# Altium PCB LineConector.PcbDoc
Units mm, origin at the board's own origin, x right, y up, seen from the top; angles counter-clockwise.
Board outline 16 x 46 mm, 2 copper layers (Top Layer, Bottom Layer); 2 components, 6 nets, 12 pads, 16 vias.
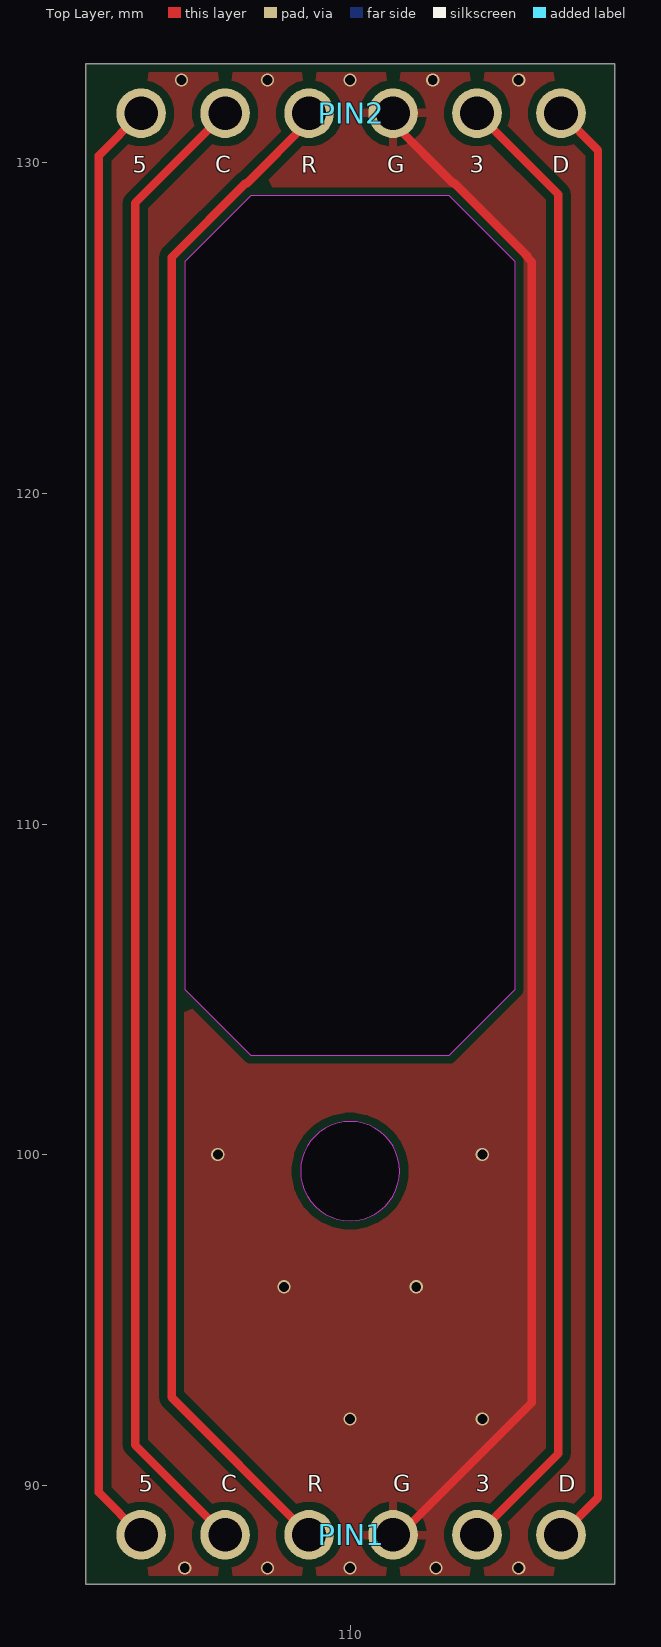
[diagram p0: Top Layer view]
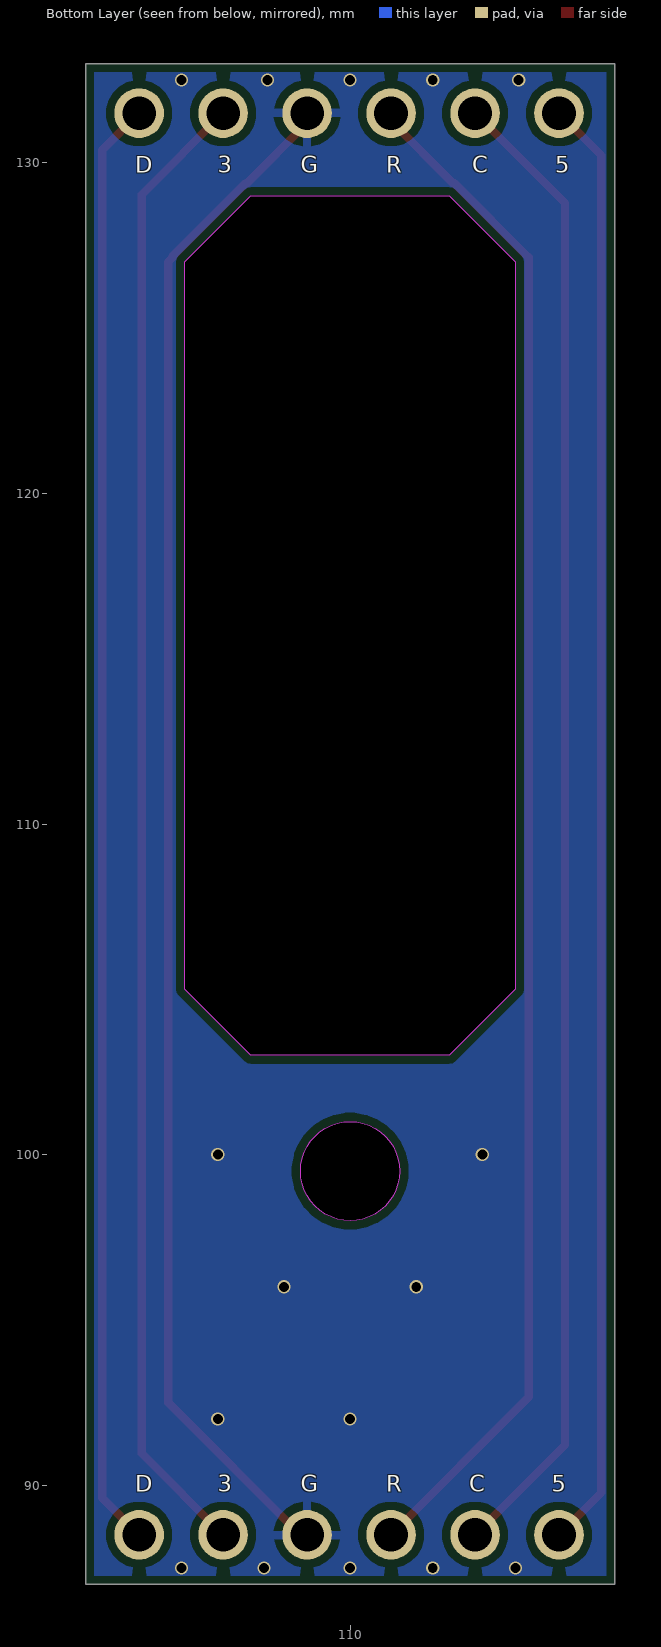
[diagram p1: Bottom Layer view, seen from below]

## Layer stack, top to bottom
Top Solder: solder mask 0.0102, Solder Resist, Dk 3.5
Top Layer: signal copper 0.0356
Dielectric 1: dielectric 0.32, FR-4, Dk 4.8
Bottom Layer: signal copper 0.0356
Bottom Solder: solder mask 0.0102, Solder Resist, Dk 3.5

## Board outline
102,87 102,133 118,133 118,87
cut-out: 108.5,99.5 ccw(c110,99.5) 110,98 ccw(c110,99.5) 111.5,99.5 ccw(c110,99.5) 110,101 ccw(c110,99.5)
cut-out: 105,105 107,103 113,103 115,105 115,127 113,129 107,129 105,127

## Design rules (kind name [scope] priority, off if disabled: settings)
BoardOutlineClearance [All] p1: gap=0.254 ignorepadtopadclearanceinfootprint=FALSE except(0: Arc-SplitContinuation Track-SplitContinuation SMDPad-SplitContinuation THPad-SplitContinuation Via-SplitContinuation Fill-SplitContinuation Poly-SplitContinuation Region-SplitContinuation Text-SplitContinuation)
Clearance [All] p1: gap=0.254 ignorepadtopadclearanceinfootprint=FALSE
PolygonConnect [All] p1: connectstyle=Relief reliefconductorwidth=0.254 reliefentries=4 polygonreliefangle="90 Angle" airgapwidth=0.254
RoutingVias [All] p1: holewidth=0.711 width=1.27 viastyle="Through Hole" minholewidth=0.711 minwidth=1.27 maxholewidth=0.711 maxwidth=1.27
SolderMaskExpansion [All] p1: expansion=0.102 istentingtop=FALSE
SupplyNets "Schematic Supply Nets_3" [InNet('+3V3')] p1: voltage=0.000
SupplyNets "Schematic Supply Nets_2" [InNet('GND')] p2: voltage=0.000
SupplyNets "Schematic Supply Nets_1" [InNet('+VREF')] p3: voltage=0.000
SupplyNets "Schematic Supply Nets" [InNet('+5V')] p4: voltage=0.000
Width [All] p1: maxlimit=1 minlimit=0.254 preferedwidth=0.254
30 further rules are at their usual default settings.

## Components (designator, comment, footprint, x,y, rotation, side; value= is the part's Value field where it differs from the comment)
PIN1 "6PIN-TH" 6PIN-TH 110,88.5 r180 top
PIN2 "6PIN-TH" 6PIN-TH 110,131.5 r180 top

## Footprints (in the part's own frame and the unit in brackets; to place one, negate y for a bottom-side part, rotate by r counter-clockwise, add the part's x,y. Pads: shape width x height; smd on the part's side, far side on the other; paste and mask are expansions set on the pad)
6PIN-TH [mm]
  round 1.5 hole 1.02: 1(-6.38,0) 2(-3.84,0) 3(-1.3,0) 4(1.24,0) 5(3.78,0) 6(6.32,0)

## Via types
v1: diameter 0.4, hole 0.3, Top Layer to Bottom Layer, 16 vias

## Nets (pads, with @x,y where several pads share a name; then routed paths per layer and width w, separated by ;. In a path a pad name is that pad's centre, name@x,y a point inside that pad or via, vN(x,y) a via of type N, cw(c..) or ccw(c..) an arc to the next point about the centre after c; other vN are vias at no path point)
+3V3: PIN1.2 PIN2.2 | length 45
  Top Layer w0.254: PIN1.2 116.3,90.96 116.3,129.04 PIN2.2
+5V: PIN1.6 PIN2.6 | length 44.1
  Top Layer w0.254: PIN1.6 102.4,89.78 102.4,130.22 PIN2.6
+VREF: PIN1.4 PIN2.4 | length 46.5
  Top Layer w0.254: PIN1.4 104.6,92.66 104.6,127.139 106.842,129.381 106.881,129.381 108.76,131.26 PIN2.4
COMP: PIN1.5 PIN2.5 | length 45.3
  Top Layer w0.254: PIN1.5 103.5,91.22 103.5,128.78 PIN2.5
GND: PIN1.3 PIN2.3 | length 46.6
  Top Layer w0.254: PIN1.3 111.5,88.5 115.5,92.5 115.5,127 115.381,127.119 115.381,127.158 113.158,129.381 113.119,129.381 111.3,131.2 PIN2.3
  other v1: 105,87.5 107.5,87.5 110,87.5 112.6,87.5 115.1,87.5 110,92 114,92 108,96 112,96 106,100 114,100 104.9,132.5 107.5,132.5 110,132.5 112.5,132.5 115.1,132.5
NEO: PIN1.1 PIN2.1 | length 43.9
  Top Layer w0.254: PIN1.1 117.5,89.62 117.5,130.38 PIN2.1

## Polygon pours and split planes (outlines as drawn)
GND on Bottom Layer "GND_L02_P001" (solid, pour order 1): 102,133 118,133 118,87 102,87
GND on Top Layer "GND_L01_P000" (solid, pour order 0): 102,133 118,133 118,87 102,87

## Silkscreen, mask and mechanical layers (free items; w line width, h text height)
Top Overlay:
  text "5" at 103.42,129.7 h0.5
  text "C" at 105.92,129.7 h0.5
  text "R" at 108.52,129.7 h0.5
  text "G" at 111.12,129.7 h0.5
  text "3" at 113.62,129.7 h0.5
  text "D" at 116.12,129.7 h0.5
  text "5" at 103.6,89.8 h0.5
  text "C" at 106.1,89.8 h0.5
  text "R" at 108.7,89.8 h0.5
  text "G" at 111.3,89.8 h0.5
  text "3" at 113.8,89.8 h0.5
  text "D" at 116.3,89.8 h0.5
Bottom Overlay:
  text "5" at 103.8,129.7 h0.5
  text "C" at 106.3,129.7 h0.5
  text "R" at 108.9,129.7 h0.5
  text "G" at 111.5,129.7 h0.5
  text "3" at 114,129.7 h0.5
  text "D" at 116.5,129.7 h0.5
  text "5" at 103.9,89.8 h0.5
  text "C" at 106.4,89.8 h0.5
  text "R" at 108.9,89.8 h0.5
  text "G" at 111.5,89.8 h0.5
  text "3" at 114,89.8 h0.5
  text "D" at 116.5,89.8 h0.5
Mechanical 1:
  circle w0.013: c110,99.5 r1.5
  lines w0.013: 102,87 102,133 118,133 118,87 102,87 ; 105,105 107,103 113,103 115,105 115,127 113,129 107,129 105,127 105,105